# Altium PCB PMP20634.PcbDoc
Units mil, origin at the board's own origin, x right, y up, seen from the top; angles counter-clockwise.
Board outline 3090 x 1240 mil, 2 copper layers (Top Layer, Bottom Layer), stack 62 mil thick; 34 components, 25 nets, 83 pads, 26 vias.
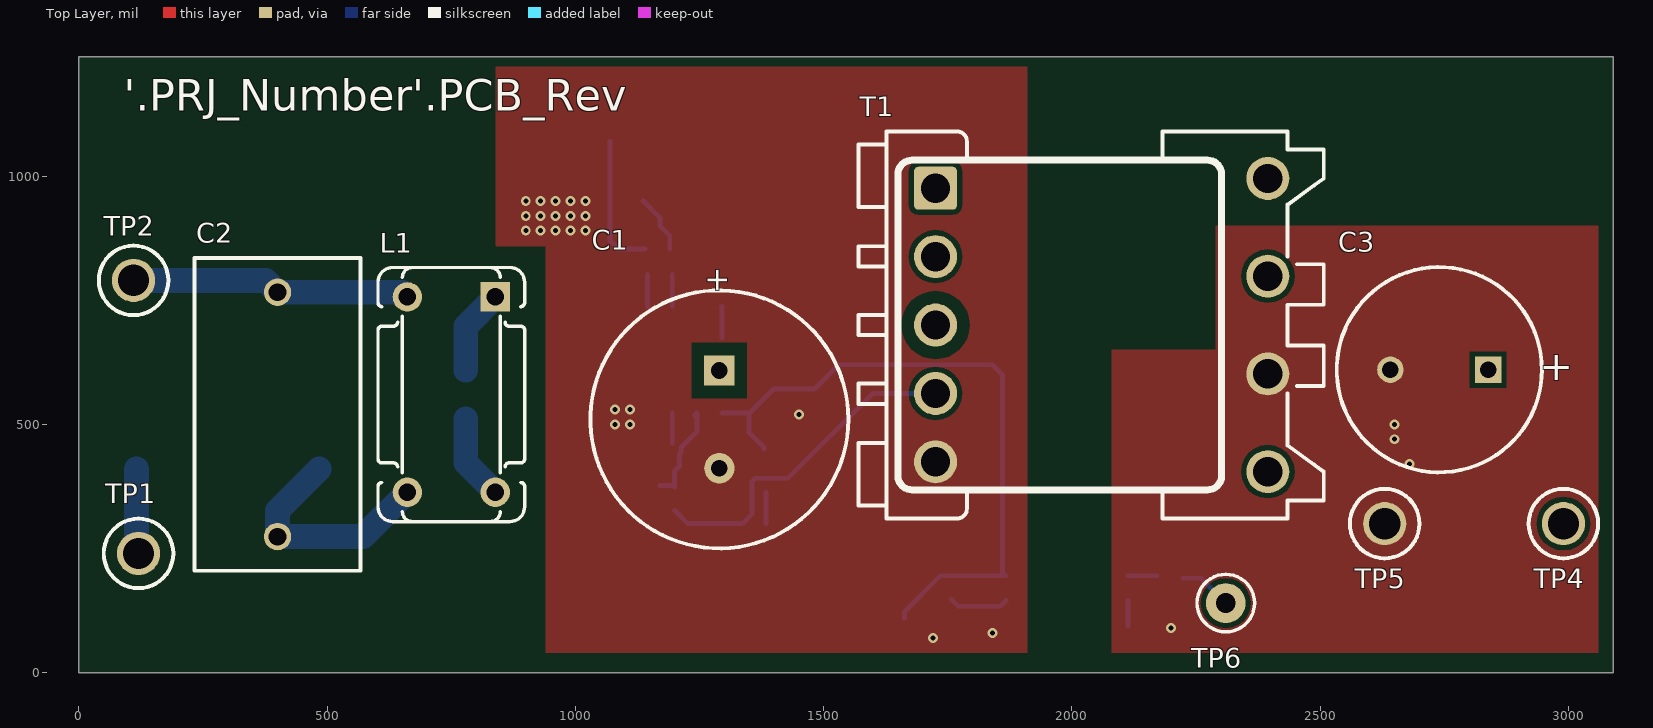
[diagram p0: Top Layer view]
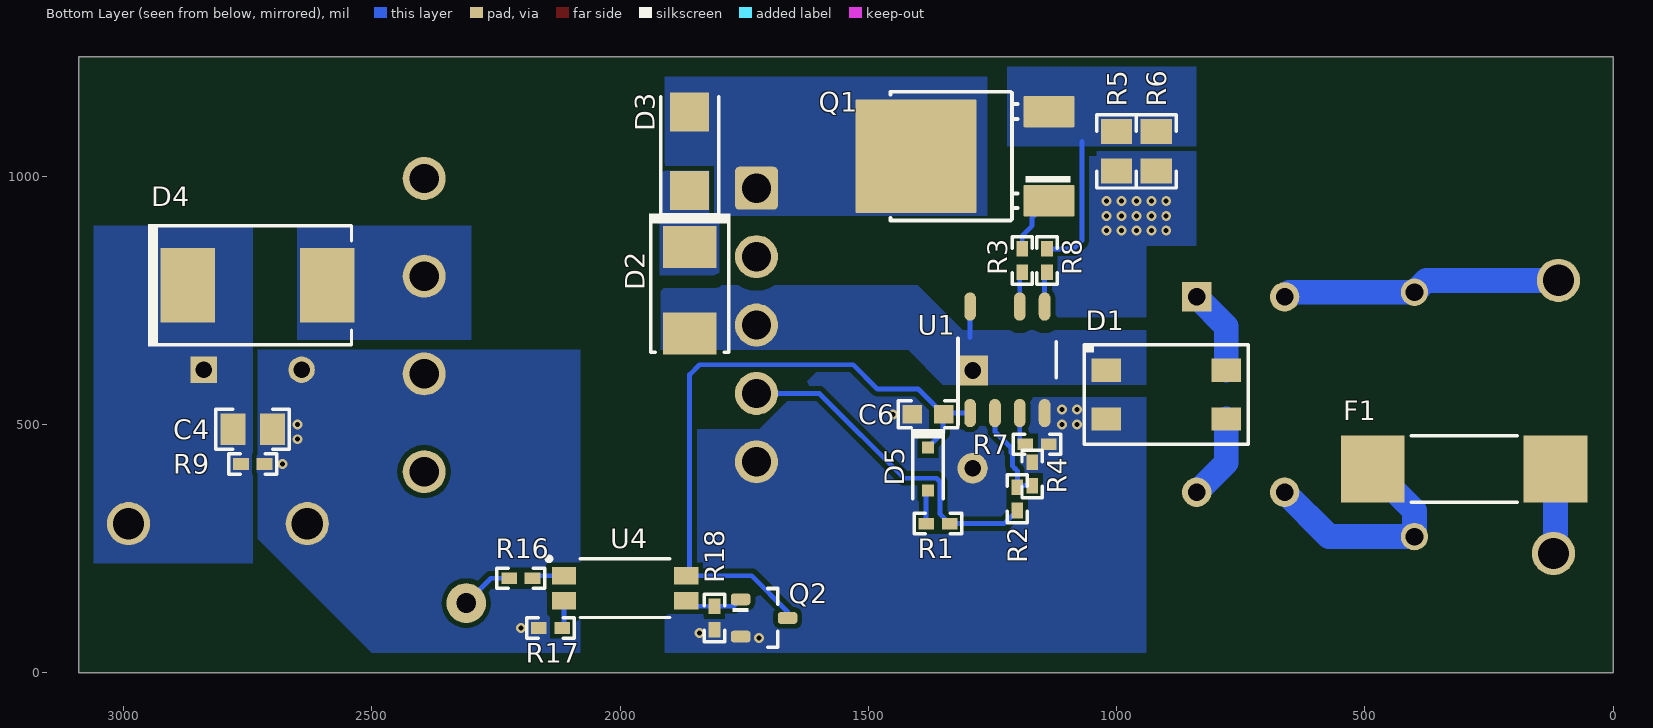
[diagram p1: Bottom Layer view, seen from below]
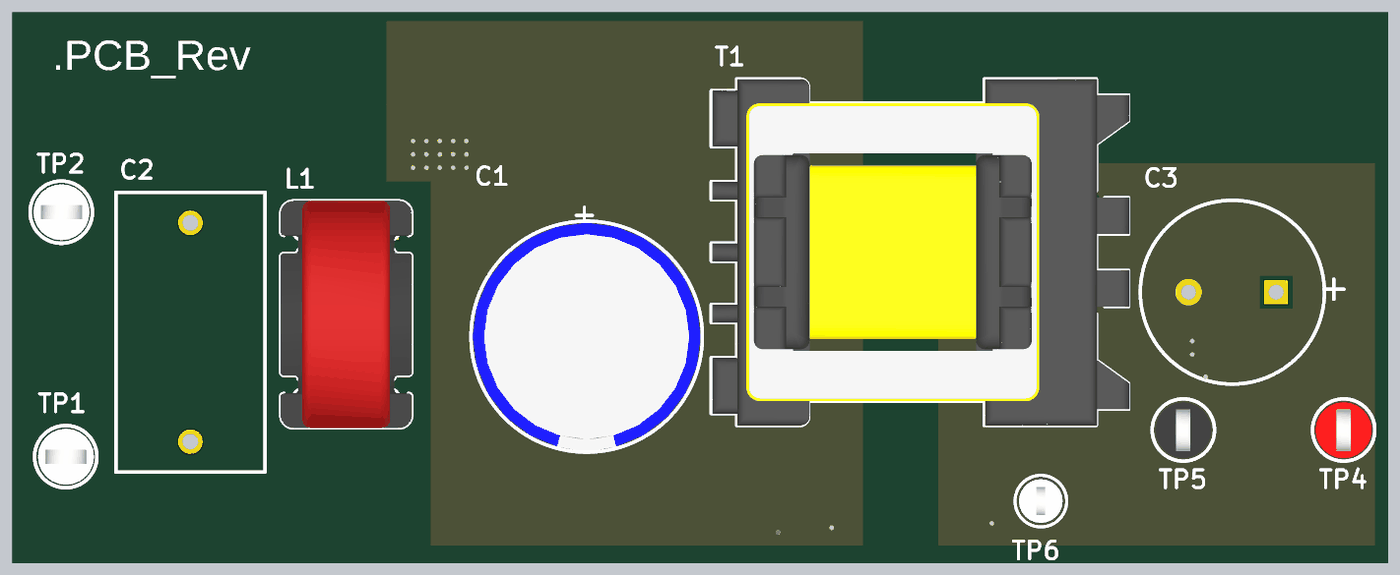
[diagram p2: 3D render of the assembled board from above, using the file's embedded part models]

## Layer stack, top to bottom
Top Solder: solder mask 0.4, Solder Resist, Dk 3.5
Top Layer: signal copper 1.4
Dielectric1: core 59.2, FR-4, Dk 4.8
Bottom Layer: signal copper 1.4
Bottom Solder: solder mask 0.4, Solder Resist, Dk 3.5

## Board outline
0,0 3090,0 3090,1240 0,1240

## Design rules (kind name [scope] priority, off if disabled: settings)
AcuteAngle [All] p1: minimum=4.50000000000000E+0001 checktracksonly=FALSE
AssemblyTestPointUsage [All] p1: valid=2
Clearance Clearance_HV [InNet('HV')] p1: gap=25
Clearance Clearance_BoardEdge_MountingHoles [OnCopper and InComponentClass('Mounting Holes') vs IsKeepOut] p2: gap=40
Clearance Clearance_BoardEdge_Poly [OnCopper and InPoly vs IsKeepOut] p3: gap=25
Clearance Clearance_BoardEdge [OnCopper and Not InComponentClass('Logo') and not InComponentClass('FiducialMark') and not InRegion(1000,500,4000,800) and Not IsKeepout vs IsKeepOut] p4: gap=75
Clearance Clearance_Poly [InPolygon] p5: gap=10
Clearance [All] p6: gap=7.87
ComponentClearance ComponentClearance_ScrewToNut [(HasFootprint('NY PMS 440 0025 PH')) vs (HasFootprint('Keystone_1902C'))] p1: gap=5 collisioncheckmode=3 verticalgap=10 showdistances=FALSE
ComponentClearance ComponentClearance_MountingHoles [InComponentClass('Mounting Holes')] p2: gap=20 collisioncheckmode=3 verticalgap=100000 showdistances=FALSE
ComponentClearance ComponentClearance_SmallPassives [HasFootprint('0201*') or HasFootprint('0402*') or HasFootprint('0508') or HasFootprint('0603*') or HasFootprint('0612') or HasFootprint('0805*') or HasFootprint('0815*') or HasFootprint('0830*') or HasFootprint('1206*') or HasFootprint('1210*') or HasFootprint('1808*') or HasFootprint('1812*') or HasFootprint('1825*') or HasFootprint('2010*') or HasFootprint('2220*') or HasFootprint('2225*') or HasFootprint('2512*') or HasFootprint('2728*') or HasFootprint('3518*') vs HasFootprint('0201*') or HasFootprint('0402*') or HasFootprint('0508') or HasFootprint('0603*') or HasFootprint('0612') or HasFootprint('0805*') or HasFootprint('0815*') or HasFootprint('0830*') or HasFootprint('1206*') or HasFootprint('1210*') or HasFootprint('1808*') or HasFootprint('1812*') or HasFootprint('1825*') or HasFootprint('2010*') or HasFootprint('2220*') or HasFootprint('2225*') or HasFootprint('2512*') or HasFootprint('2728*') or HasFootprint('3518*')] p3: gap=10 collisioncheckmode=3 verticalgap=10 showdistances=FALSE
ComponentClearance ComponentClearance_THtoSMT [IsThruComponent vs IsSMTComponent] p4: gap=20 collisioncheckmode=3 verticalgap=100000 showdistances=FALSE
ComponentClearance ComponentClearance_THtoTH [IsThruComponent vs IsThruComponent] p5: gap=20 collisioncheckmode=3 verticalgap=100000 showdistances=FALSE
ComponentClearance [All] p6: gap=20 collisioncheckmode=3 verticalgap=10 showdistances=FALSE
DiffPairsRouting [All] p1: maxlimit=100 minlimit=10 mostfreqgap=10 toplayer_minwidth=15 toplayer_maxwidth=15 toplayer_prefwidth=15 bottomlayer_minwidth=15 bottomlayer_maxwidth=15 bottomlayer_prefwidth=15 maxuncoupledlength=1000
FabricationTestPointUsage TestPointUsage [All] p1: valid=2 allowmultiple=FALSE
FabricationTestpoint Testpoint [All] p1: side=3 testpointundercomponent=TRUE minsize=40 maxsize=100 preferedsize=60 minholesize=0 maxholesize=40 preferedholesize=32 testpointgrid=1 allowsidetop=TRUE allowsidebottom=TRUE usegrid=TRUE gridtolerance=0.01
FanoutControl Fanout_LCC [IsLCC] p1: bgadir=Out bgaviamode=Centered fanoutstyle=Auto fanoutdirection=Alternating viagrid=1 // Fanout_LCC (Default Rule)
FanoutControl Fanout_BGA [IsBGA] p2: bgadir=Out bgaviamode=Centered fanoutstyle=Auto fanoutdirection=Alternating viagrid=1 // Fanout_BGA (Default Rule)
FanoutControl Fanout_Default [All] p4: bgadir=Out bgaviamode=Centered fanoutstyle=Auto fanoutdirection=Alternating viagrid=1 // Fanout_Default (Default Rule)
FanoutControl Fanout_Small [(CompPinCount < 5)] p5: bgadir=Out bgaviamode=Centered fanoutstyle=Auto fanoutdirection=OutThenIn viagrid=1 // Fanout_Small (Default Rule)
HoleSize [All] p1: absolutevalues=TRUE maxlimit=251 minlimit=7 maxpercent=80.000 minpercent=20.000
MinimumAnnularRing [All] p1: minimumring=5
MinimumSolderMaskSliver MinimumSolderMaskSliver_Logo [InComponentClass('Logo') vs InComponentClass('Logo')] p1: minsoldermaskwidth=0
MinimumSolderMaskSliver SilkscreenOverComponentPads [All] p2: minsoldermaskwidth=0
MinimumSolderMaskSliver [All] p3: minsoldermaskwidth=0
PlaneConnect [All] p1: planeconnectstyle=Direct reliefexpansion=10 reliefentries=4 reliefconductorwidth=10 reliefairgap=10
PolygonConnect [All] p1: connectstyle=Direct reliefconductorwidth=10 reliefentries=4 polygonreliefangle="90 Angle" airgapwidth=10
RoutingVias [All] p1: holewidth=16 width=34 viastyle="Through Hole" minholewidth=7 minwidth=19 maxholewidth=40 maxwidth=65
SMDToCorner [All] p1: distance=0
SilkToBoardRegionClearance [Not ((IsComment or IsDesignator) And (Hide <> 'False')) and not InRegion(1000,500,4000,800)] p1:
SilkToSilkClearance [All] p1: silktosilkclearance=0
SilkToSolderMaskClearance [IsPad] p1: minsilkscreentomaskgap=0 clearancetoexposedcopper=TRUE
SolderMaskExpansion [All] p1: expansion=3
Width [All] p1: maxlimit=100 minlimit=6 preferedwidth=10 checkconnectedcopper=TRUE
15 further rules are at their usual default settings.

## Components (designator, comment, footprint, x,y, rotation, side; value= is the part's Value field where it differs from the comment)
C1 "EKXG401ELL220MK20S" KXG_1250x2000 1290,510 r270 top
C2 "ECQ-U3A104MG" ECQUG_1500x800x1500 400,520 r90 top
C3 "EKZE250ELL681MJ20S" Chemi-Con_1000x2000 2740,610 r180 top
C4 "GRM219R61E106KA12" 0805_HV 2740,490 r180 bottom
C6 "GRM188R6YA475KE15D" 0603 1380,520 r0 bottom
D1 "RH06-T" MiniDIP 900,560 r180 bottom
D2 "SMBJ150A-13-F" SMB 1860,770 r270 bottom
D3 "MURA160T3G" SMA 1860,1050 r90 bottom
D4 "B3100-13-F" SMC 2730,780 r180 bottom
D5 "BAS16J,135" SOD-323F 1380,410 r270 bottom
F1 "0443001.DR" FUSE_0443 300,410 r180 bottom
L1 "744821201" WE-CMB_XS 750,560 r270 top
Q1 "FCD4N60TM" DPAK 1270,1040 r0 bottom
Q2 "AO3406" SOT-23 1710,110 r180 bottom
R1 "CRCW04020000Z0ED" 0402 1360,300 r180 bottom
R2 "CRCW040273K2FKED" 0402 1200,350 r270 bottom
R3 "CRCW04020000Z0ED" 0402 1190,830 r90 bottom
R4 "CRCW040233K2FKED" 0402 1170,400 r270 bottom
R5 "CRCW08051R60JNEA" 0805_HV 1000,1050 r90 bottom
R6 "CRCW08051R60JNEA" 0805_HV 920,1050 r90 bottom
R7 "CRCW0402115KFKED" 0402 1160,460 r0 bottom
R8 "CRCW04021K33FKED" 0402 1140,830 r90 bottom
R9 "CRCW04027K50JNED" 0402 2740,420 r0 bottom
R16 "CRCW04021K00FKED" 0402 2200,190 r180 bottom
R17 "CRCW04021K00FKED" 0402 2140,90 r0 bottom
R18 "CRCW040210K0FKED" 0402 1810,110 r90 bottom
T1 "750316686" Wurth_EE16-8-5_5280 2060,700 r0 top
TP1 "5012" Keystone5012 120,240 r90 top
TP2 "5012" Keystone5012 110,790 r90 top
TP4 "5010" Keystone5010 2990,300 r0 top
TP5 "5011" Keystone5011 2630,300 r0 top
TP6 "5002" Keystone5002 2310,140 r0 top
U1 "UCC28730DR" D0007A_N 1220,630 r90 bottom
U4 "VOS617A-7X001T" SSOP-4_VISHAY 1990,170 r180 bottom

## Footprints (in the part's own frame and the unit in brackets; to place one, negate y for a bottom-side part, rotate by r counter-clockwise, add the part's x,y. Pads: shape width x height; smd on the part's side, far side on the other; paste and mask are expansions set on the pad)
0402 [mm] "0402 from SM-752 data"
  rect 0.8x0.6 smd: 1(-0.6,0) 2(0.6,0)
  silkscreen extent -1.22,-0.52 1.22,0.52, body extent -0.55,-0.3 0.55,0.3, height 0.6
0603 [mm] "0603 from SM-752 data"
  rect 1x0.95 smd: 1(-0.8,0) 2(0.8,0)
  silkscreen extent -1.52,-0.69 1.52,0.69, body extent -0.87,-0.47 0.87,0.47, height 1
0805_HV [mil] "0805 with 30mil clearance between pads"
  rect 50x63 smd: 1(-40,0) 2(40,0)
  silkscreen extent -74,-40 74,40, body extent -43,-29 43,29, height 57
Chemi-Con_1000x2000 [mm] "TH, 2-Leads, Body 10x20mm, Pin Spacing 5mm"
  rect 1.35x1.35 hole 0.85: 1(-2.5,0)
  round 1.35 hole 0.85: 2(2.5,0)
  silkscreen extent -5.25,-5.25 5.25,5.25, body extent -5.25,-5.25 5.25,5.25, height 21.5
D0007A_N [mm] "SOIC, 7-Leads, Body 4.9x3.9mm, Pitch 1.27mm, IPC Medium Density"
  oval 1.45x0.6 smd: 1(-2.725,1.905) 2(-2.725,0.635) 3(-2.725,-0.635) 4(-2.725,-1.905) 5(2.725,-1.905) 6(2.725,-0.635) 8(2.725,1.905)
  silkscreen extent -3.32,-2.5 1.1,2.52, body extent -3.01,-2.45 3.01,2.45, height 1.75
DPAK [mm] "D-PAK, 3-Pads, Body 6.22x6.73mm (max), TO-252AA using nominal STEP model"
  rrect6% 2.6x1.6 smd: 1(-3.4,2.28) 3(-3.4,-2.28)
  rrect2% 6.2x5.8 smd paste-2.9: 4(3.4,0)
  silkscreen extent -4.5,-3.3 4.7,3.28, body extent -3.86,-3.29 5.84,3.29, height 2.48
ECQUG_1500x800x1500 [mm] "TH, 2-Leads, Body 15x8mm, Pin Spacing 12.5mm"
  round 1.4 hole 0.9: 1(-6.25,0) 2(6.25,0)
  silkscreen extent -8,-4.25 8,4.25, body extent -8,-4.25 8,4.25, height 15.5
FUSE_0443 [mm] "LITTELFUSE"
  rect 3.25x3.43 smd: 1(-4.675,0) 2(4.675,0)
  silkscreen extent -2.7,-1.7 2.7,1.7, body extent -5.05,-1.56 5.05,1.56, height 3.12
Keystone5002 [mil] "For Keystone 500x miniature loop terminals"
  round 80 hole 40: 1(0,0)
  silkscreen extent -58,-58 58,58, body extent -49,-49 49,49, height 182
Keystone5010 [mil] "Keystone Multipurpose loops"
  round 87 hole 63: 1(0,0)
  silkscreen extent -70,-70 70,70, body extent -63,-63 63,62, height 319
Keystone5011 [mil] "Keystone Multipurpose loops"
  round 87 hole 63: 1(0,0)
  silkscreen extent -70,-70 70,70, body extent -63,-63 63,62, height 319
Keystone5012 [mil] "Keystone Multipurpose loops"
  round 87 hole 63: 1(0,0)
  silkscreen extent -70,-70 70,70, body extent -63,-63 63,62, height 319
KXG_1250x2000 [mm] "United Chemicon"
  rect 1.55x1.55 hole 0.85: 1(-2.5,0)
  round 1.55 hole 0.85: 2(2.5,0)
  silkscreen extent -6.6,-6.6 6.6,6.6, body extent -6.45,-6.49 6.49,6.49, height 21.51
MiniDIP [mm] "Land pattern created based on STEP model."
  rect 1.52x1.2 smd: 1(-3.075,1.25) 2(-3.075,-1.25) 3(3.075,-1.25) 4(3.075,1.25)
  silkscreen extent -4.19,-2.54 4.19,2.54, body extent -3.5,-2.45 3.5,2.45, height 2.75
SMA [mm] "Molded Diode, 2-Leads, Body 4.3x2.6mm, IPC Medium Density, based on OnSemi component dimensions and land pattern"
  rect 2x2 smd: 1(-2,0) 2(2,0)
  silkscreen extent -3.66,-1.57 2.79,1.57, body extent -2.6,-1.3 2.6,1.3, height 2.42
SMB [mil] "Molded Diode, 2-Leads, Body 5.4x3.6mm, IPC Medium Density, based on OnSemi component dimensions"
  rect 85x107.99 smd: 1(-87.01,0) 2(87.01,0)
  silkscreen extent -155,-82 125,82, body extent -106,-71 106,71, height 91
SMC [mil] "Molded Diode, 2-Leads, Body 6.9x5.8mm, IPC Medium Density, based on OnSemi component dimensions and land patterns"
  rect 110x150 smd: 1(-140.49,0) 2(140.49,0)
  silkscreen extent -221,-123 189,124, body extent -156,-116 157,116, height 91
SOD-323F [mm] "NXP recommended land pattern"
  rect 0.6x0.6 smd paste-0.05: 1(-1.1,0) 2(1.1,0)
  silkscreen extent -2.06,-0.86 1.53,0.86, body extent -1.35,-0.68 1.35,0.67, height 0.79
SOT-23 [mm] "SOT23, 3-Leads, Body 2.9x1.3mm, Pitch 0.95mm, Lead Span 2.5mm, IPC Medium Density"
  rrect50% 1x0.6 smd: 1(-1.2,0.95) 2(-1.2,-0.95) 3(1.2,0)
  silkscreen extent -1.63,-1.5 0.7,1.5, body extent -1.16,-1.45 1.21,1.45, height 1
SSOP-4_VISHAY [mm] "Vishay Recommened"
  rect 1.25x0.9 smd: 1(-3.125,0.635) 2(-3.125,-0.635) 3(3.125,-0.635) 4(3.125,0.635)
  silkscreen extent -3.98,-1.5 2.3,1.59, body extent -3.5,-1.45 3.5,1.45, height 2.42
WE-CMB_XS [mm] "WE-CMB Series Size XS"
  rect 1.5x1.5 hole 0.9: 1(-5,2.25)
  round 1.5 hole 0.9: 2(-5,-2.25) 3(5,-2.25) 4(5,2.25)
  silkscreen extent -6.5,-3.75 6.5,3.75, body extent -6.5,-3.75 6.5,3.75, height 16.24
Wurth_EE16-8-5_5280 [mm] "Wurth"
  rrect20% 2.2x2.2 hole 1.5: 1(-8.5,7)
  round 2.2 hole 1.5: 2(-8.5,3.5) 3(-8.5,0) 4(-8.5,-3.5) 5(-8.5,-7) 6(8.5,-7.5) 7(8.5,-2.5) 8(8.5,2.5) 9(8.5,7.5)
  silkscreen extent -12.45,-9.9 11.36,9.9, body extent -12.4,-9.9 11.41,9.9, height 14.9

## Part data
C1: "CAP, AL, 22 µF, 400 V, +/- 20%, TH"
C2: "CAP, Film, 0.1 µF, 300 V, +/- 20%, TH"
C3: "CAP, AL, 680 µF, 25 V, +/- 20%, TH"
C4: "CAP, CERM, 10 µF, 25 V, +/- 10%, X5R, 0805"
C6: "CAP, CERM, 4.7 µF, 35 V, +/- 10%, X5R, 0603"
D1: "Diode, Switching-Bridge, 600 V, 0.5 A, MiniDIP"
D2: "Diode, TVS, Uni, 150 V, 243 Vc, SMB"
D3: "Diode, Ultrafast, 600V, 1A, SMA"
D4: "Diode, Schottky, 100 V, 3 A, SMC"
D5: "Diode, Switching, 100 V, 0.25 A, SOD-323F"
F1: "Fuse, 1 A, 250VAC/VDC, SMD"
L1: "Coupled inductor, 1 mH, 2 A, 0.045 ohm, TH"
Q1: "MOSFET, N-CH, 600 V, 3.9 A, DPAK"
Q2: "MOSFET, N-CH, 30 V, 3.6 A, SOT-23"
R1 R3: "RES, 0, 5%, 0.063 W, 0402"
R2: "RES, 73.2 k, 1%, 0.063 W, 0402"
R4: "RES, 33.2 k, 1%, 0.063 W, 0402"
R5 R6: "RES, 1.6, 5%, 0.125 W, 0805"
R7: "RES, 115 k, 1%, 0.063 W, 0402"
R8: "RES, 1.33 k, 1%, 0.063 W, 0402"
R9: "RES, 7.5 k, 5%, 0.063 W, 0402"
R16 R17: "RES, 1.00 k, 1%, 0.063 W, 0402"
R18: "RES, 10.0 k, 1%, 0.063 W, 0402"
T1: "Transformer, 500 uH, EE16/8/5, TH"
TP1 TP2: "Test Point, Multipurpose, White, TH"
TP4: "Test Point, Multipurpose, Red, TH"
TP5: "Test Point, Multipurpose, Black, TH"
TP6: "Test Point, Miniature, White, TH"
U1: "Constant-Voltage Constant-Current Flyback Controller With PSR and Wake-Up Monitoring, D0007A (SOIC-7)"
U4: "Optocoupler, 3.75 kV, 80-160% CTR, SMT"

## Via types
v1: diameter 20, hole 10, Top Layer to Bottom Layer, tented both sides, 26 vias

## Nets (pads, with @x,y where several pads share a name; then routed paths per layer and width w, separated by ;. In a path a pad name is that pad's centre, name@x,y a point inside that pad or via, vN(x,y) a via of type N, cw(c..) or ccw(c..) an arc to the next point about the centre after c; other vN are vias at no path point)
12VOUT: C3.1 C4.1 D4.1 R9.2 TP4.1
GND: C3.2 C4.2 R9.1 R17.2 T1.7 TP5.1
  other v1: 2200,90 2680,420 2650,470 2650,500
HV: C1.1 D1.1 D2.2 T1.3 U1.8 | length 62.3
  Bottom Layer w10: 1295,675 U1.8
NetC2_1: C2.1 F1.1 L1.3 | length 469.3
  Bottom Layer w50: F1.1 400,325.94 C2.1 572.2,273.94 L1.3
NetC2_2: C2.2 L1.2 TP2.1 | length 565.1
  Bottom Layer w50: TP2.1 376.06,790 C2.2 652.2,766.06 L1.2
NetD1_3: D1.3 L1.4 | length 172.3
  Bottom Layer w50: D1.3 778.94,422.8 L1.4
NetD1_4: D1.4 L1.1 | length 172.3
  Bottom Layer w50: D1.4 778.94,697.2 L1.1
NetD2_1: D2.1 D3.1
NetD3_2: D3.2 Q1.4 T1.1
NetD4_2: D4.2 T1.8
NetD5_2: D5.2 R1.1 | length 63.1
  Bottom Layer w10: R1.1 D5.2@1383.62,363.07
NetF1_2: F1.2 TP1.1 | length 165.9
  Bottom Layer w50: TP1.1@115.94,244.06 F1.2
NetQ1_1: Q1.1 R3.2 | length 118.9
  Bottom Layer w10: Q1.1 1170,916.38 1170,900 1190,880 R3.2
NetQ1_3: Q1.3 R5.2 R6.2 R8.2 | length 276.8
  Bottom Layer w10: 1070,1070 1070,870 1086.38,853.62 R8.2
NetQ2_1: Q2.1 R18.2 U4.3 | length 120.1
  Bottom Layer w10: Q2.1 1771.02,133.62 R18.2 1855.59,133.62 U4.3
NetR1_2: R1.2 R2.2 T1.4 | length 682.9
  Bottom Layer w10: R2.2 1226.38,300 R1.2 1355.32,318.94 1355.32,383.84 1362.86,391.38 1427.76,391.38 1598.58,562.2 T1.4
NetR2_1: R2.1 R4.2 U1.2 | length 200.8
  Bottom Layer w10: R4.2 1197.24,376.38 R2.1 1200,406.38 ; 1203.62,410 1210,416.38 1210,440.43 1212.37,442.8 1212.37,452.37 1245,485 U1.2 U1.2@1240,517.72
NetR3_1: R3.1 U1.6 | length 64.1
  Bottom Layer w10: U1.6 R3.1@1195,801.38
NetR7_2: R7.2 U1.3 | length 61.3
  Bottom Layer w10: R7.2@1195,461.38 U1.3
NetR8_1: R8.1 U1.5 | length 64.1
  Bottom Layer w10: U1.5 R8.1@1145,801.38
NetR16_1: R16.1 TP6.1 | length 107.1
  Bottom Layer w10: R16.1 2260,190 TP6.1
NetR16_2: R16.2 U4.1 | length 58.3
  Bottom Layer w10: U4.1 R16.2@2171.38,195
NetR17_1: R17.1 U4.2 | length 51.7
  Bottom Layer w10: R17.1@2113.03,93.35 U4.2
PGND: C1.2 C6.2 D1.2 Q2.2 R4.1 R5.1 R6.1 R7.1 R18.1 T1.5 U1.4
  other v1: 1720,70 1840,80 1080,500 1110,500 1450,520 1080,530 1110,530 900,890 930,890 960,890 990,890 1020,890 900,920 930,920 960,920 990,920 1020,920 900,950 930,950 960,950 990,950 1020,950
VDD: C6.1 D5.1 Q2.3 U1.1 U4.4 | length 1353.7
  Bottom Layer w10: U1.1 1345.79,522.72 C6.1 ; D5.1@1380,450 D5.1 1350,483.31 1350,518.5 C6.1 ; Q2.3 1662.76,122.76 1735,195 U4.4 1860,201.97 1860,600 1840,620 1530.67,620 1481.88,571.21 1399.72,571.21 C6.1
pads on no net: T1.2 T1.6 T1.9

## Polygon pours and split planes (outlines as drawn)
HV on Bottom Layer "BOTTOM_LAYER_HV_P026" (solid, remove dead copper, pour order 26): 1550,650 1420,650 1350,580 1230,580 940,580 940,690 1310,690 1400,780 1710,780 1918.5,780 1918.5,650
PGND on Bottom Layer "BOTTOM_LAYER_PGND_P027" (solid, remove dead copper, pour order 27): 840,1034.51 840,860 940,860 940,40 1910,40 1910,490 1720,490 1170,1040 840,1040
GND on Bottom Layer "BOTTOM_LAYER_GND_P018" (solid, remove dead copper, pour order 18): 2080,650 2080,40 2500,40 2740,280 2740,650
PGND on Bottom Layer "BOTTOM_LAYER_PGND_P016" (solid, remove dead copper, pour order 16): 840,1060 840,860 1040,860 1040,1060
12VOUT on Bottom Layer "BOTTOM_LAYER_12VOUT_P014" (solid, remove dead copper, pour order 14): 2740,900 2740,220 3060,220 3060,900 2740,900
NetD4_2 on Bottom Layer "BOTTOM_LAYER_NETD4_2_P012" (solid, remove dead copper, pour order 12): 2300,900 2300,670 2650,670 2650,900 2300,900
NetD2_1 on Bottom Layer "BOTTOM_LAYER_NETD2_1_P008" (solid, remove dead copper, pour order 8): 1800,1050 1800,800 1920,800 1920,1050
NetD3_2 on Bottom Layer "BOTTOM_LAYER_NETD3_2_P006" (solid, remove dead copper, pour order 6): 1260,1200 1260,920 1910,920 1910,1200
NetQ1_3 on Bottom Layer "BOTTOM_LAYER_NETQ1_3_P004" (solid, remove dead copper, pour order 4): 840,1220 840,1060 1220,1060 1220,1220
GND on Top Layer "TOP_LAYER_GND_P024" (solid, remove dead copper, pour order 24): 2080,40 2080,650 2290,650 2290,900 3060,900 3060,220 3060,40 2080,40
PGND on Top Layer "TOP_LAYER_PGND_P022" (solid, remove dead copper, pour order 22): 1910,1220 840,1220 840,860 840.81,859.19 940,859.19 940,40 1910,40

## Keep-outs
Keep-Out Layer:
  text ".Layer_Name" at 577,-858.49 h60

## Other copper
Top Layer:
  text ".Layer_Name" at 577,-858.49 h60
Bottom Layer:
  text ".Layer_Name" at 577,-858.49 h60

## Silkscreen, mask and mechanical layers (free items; w line width, h text height)
Top Overlay:
  text "'.PRJ_Number'.PCB_Rev" at 90,1110 h108.27
  text ".Layer_Name" at 577,-858.49 h60
Bottom Overlay:
  text ".Layer_Name" at 577,-858.49 h60
Top Paste:
  text ".Layer_Name" at 577,-858.49 h60
Bottom Paste:
  text ".Layer_Name" at 577,-858.49 h60
Top Solder:
  text ".Layer_Name" at 577,-858.49 h60
  text ".Layer_Name" at 577,-858.49 h60
Bottom Solder:
  text ".Layer_Name" at 577,-858.49 h60
Drill Guide:
  text ".Layer_Name" at 577,-858.49 h60
M1 Board Outline:
  the board outline again, w10
  text ".Layer_Name" at 577,-858.49 h60
M2 Board Dimensions:
  rectangle: 0,-275 125,-150
  rectangle: 125,-400 500,-275
  lines w7: 0,-275 1000,-275 ; 125,-400 125,-150 ; 250,-400 250,-150 ; 500,-400 500,-150 ; 750,-400 750,-150 ; 0,-400 1000,-400 1000,-150 0,-150 0,-400
  text ".Layer_Name" at 577,-858.49 h60
M3 3D STEP Top:
  text ".Layer_Name" at 577,-858.49 h60
M4 3D STEP Bottom:
  text ".Layer_Name" at 577,-858.49 h60
M5 Assembly Top:
  lines w10: -292,-930.17 6308,-930.17 ; -292,-726.83 6310,-726.83 ; -292,-523.5 -292,-1133.5 3713,-1133.5 6310,-1133.5 6310,-523.5 -291.5,-523.5 -291.5,-1133.5 1284,-1133.5 ; 2173,-1133.5 2173,-523.5 ; 3440,-726.83 3440,-523.5 ; 4280,-726.83 4280,-523.5 ; 4902,-1140 4902,-937.17
  text "COMPONENTS MARKED 'DNP' SHOULD NOT BE POPULATED." at 1153.5,-318.5 h60
  text "ASSEMBLY VARIANT:" at 1153,-434 h60
  text ".VariantName" at 2189,-434 h60
  text "PCB VIEWED FROM TOP SIDE" at -228.5,-655.67 h60
  text "BOARD #:" at 2248,-655.67 h60
  text ".PRJ_Number" at 2793.5,-655.67 h60
  text "REV:" at 3638,-655.67 h60
  text ".PCB_Rev" at 3929.5,-655.67 h60
  text "SVN REV:" at 4476,-655.67 h60
  text ".VersionControl_RevNumber" at 4982,-655.67 h60
  text "TID #:" at 2248,-859 h60
  text ".TID" at 2793.5,-859 h60
  text "PLOT NAME =" at -228.5,-1064.34 h60
  text ".plot_File_Name" at 577,-1064.34 h60
  text "GENERATED    :" at 2250,-1064.34 h60
  text ".Print_Date" at 3119.5,-1064.34 h60
  text ".Print_Time" at 3848.5,-1064.34 h60
  text "TEXAS INSTRUMENTS" at 5113,-1064.34 h60
M6 Assembly Bottom:
  lines w10: -292.5,-727.33 6309.5,-727.33 ; -290.5,-930.67 6309.5,-930.67 ; 1115.5,-1140.5 1115.5,-937.67 ; 1737.5,-727.33 1737.5,-524 ; 2577.5,-727.33 2577.5,-524 ; 3844.5,-1134 3844.5,-524 ; 4733.5,-1134 6309,-1134 6309,-524 -292.5,-524 -292.5,-1134 2304.5,-1134 6309.5,-1134 6309.5,-524
  text "COMPONENTS MARKED 'DNP' SHOULD NOT BE POPULATED." at 6102,-318 h60
  text ".VariantName" at 5058,-434 h60
  text "ASSEMBLY VARIANT:" at 6097,-434 h60
  text ".VersionControl_RevNumber" at 1035.5,-656.17 h60
  text "SVN REV:" at 1541.5,-656.17 h60
  text ".PCB_Rev" at 2088,-656.17 h60
  text "REV:" at 2379.5,-656.17 h60
  text ".PRJ_Number" at 3224,-656.17 h60
  text "BOARD #:" at 3769.5,-656.17 h60
  text "PCB VIEWED FROM BOTTOM SIDE" at 6246,-656.17 h60
  text ".TID" at 3224,-859.5 h60
  text "TID #:" at 3769.5,-859.5 h60
  text "TEXAS INSTRUMENTS" at 904.5,-1064.84 h60
  text ".Print_Time" at 2169,-1064.84 h60
  text ".Print_Date" at 2898,-1064.84 h60
  text "GENERATED    :" at 3767.5,-1064.84 h60
  text ".plot_File_Name" at 5440.5,-1064.84 h60
  text "PLOT NAME =" at 6246,-1064.84 h60
M9 Title Sheet:
  drawing of 57 lines, arcs and shapes, not listed
  text "1" at 739.84,8036.5 h70
  text "2" at 3235.5,8036.5 h70
  text "3" at 5724.84,8036.5 h70
  text "4" at 8231.51,8036.5 h70
  text "5" at 10730.5,8036.5 h70
  text "6" at 13235.5,8036.5 h70
  text "A" at -416.5,6893.5 h70
  text "A" at 14383.5,6893.5 h70
  text "B" at -416.5,4513.5 h70
  text "B" at 14383.5,4513.5 h70
  text "C" at -416.5,2138.5 h70
  text "C" at 14383.5,2138.5 h70
  text "PROJECT TITLE:" at 11343.5,277.5 h45
  text ".PRJ_Title" at 11393.5,144.17 h70
  text "DESIGNED FOR:" at 11343.5,-23.5 h45
  text ".PRJ_Customer" at 11393.5,-163.5 h70
  text "D" at -416.5,-231.5 h70
  text "D" at 14383.5,-231.5 h70
  text "FILE NAME:" at 11343.5,-323.5 h45
  text ".PCB_File_Name_No_Path" at 11393.5,-443.5 h70
  text "Texas Instruments (TI) and/or its licensors do not warrant the accuracy or completeness of this specification" at 6374,-605.34 h45
  text "ENGINEER:" at 11343.5,-613.5 h45
  text "LAYOUT BY:" at 12848.5,-613.5 h45
  text "or any information contained therein. TI and/or its licensors do not warrant that this design will meet" at 6329.01,-718 h45
  text ".PRJ_Engineer" at 11393.5,-768.49 h70
  text ".PCB_Layout" at 12899,-768.49 h70
  text "the specifications, will be suitable for your application or fit for any particular purpose, or will operate in" at 6329.01,-830.67 h45
  text ".Layer_Name" at 577,-858.49 h60
  text "ALTIUM DESIGNER VERSION:" at 12848.5,-923.5 h45
  text "an implementation. TI and/or its licensors do not warrant that the design is production worthy. You should" at 6329.01,-943.33 h45
  text "completely validate and test your design implementation to confirm the system functionality for your application." at 6374,-1056 h45
  text ".print_Scale" at 11393.5,-1056.83 h70
  text ".Application_BuildNumber" at 12899,-1056.83 h70
  text "1" at 739.84,-1263.5 h70
  text "2" at 3235.5,-1263.5 h70
  text "3" at 5724.84,-1263.5 h70
  text "4" at 8231.51,-1263.5 h70
  text "5" at 10730.5,-1263.5 h70
  text "6" at 13235.5,-1263.5 h70
M10 Fab Notes:
  drawing of 173 lines, arcs and shapes, not listed
  text "DESIGN INFORMATION" at 12378.02,6201 h60
  text "MIN. TRACK WIDTH:" at 11733.46,6021 h60
  text "8" at 12829.7,6021 h60
  text "MIL" at 12984.46,6021 h60
  text "MIN. CLEARANCE:" at 11733.46,5889 h60
  text "0.2" at 12769.7,5889 h60
  text "mm" at 12984.46,5889 h60
  text "MIN. VIA PAD SIZE:" at 11733.46,5757 h60
  text "24" at 12799.71,5757 h60
  text "MIL" at 12984.46,5757 h60
  text "0.05mm (2MIL)" at 12428.46,5615.29 h60
  text "MINIMUM ANNULAR RING" at 11404.23,5611 h60
  text "EXTERNAL" at 13136.46,5611 h60
  text "PER" at 11604.23,5493 h60
  text "IPC-D-275 CLASS 2 LEVEL C" at 11824.23,5493 h60
  text "MIL, HOLES" at 13312.46,5380.71 h60
  text "+/-" at 12920,5380 h60
  text "+/-" at 13774,5380 h60
  text "REGISTRATION TOLERANCES:" at 11404.23,5375 h60
  text "METAL" at 12604,5375 h60
  text "5" at 13180.2,5375 h60
  text "3" at 14013.2,5375 h60
  text "MIL" at 14129.46,5375 h60
  text "+/-" at 13774,5262 h60
  text "HOLE SIZE TOLERANCE (UNLESS OTHERWISE SPECIFIED):" at 11404.23,5257 h60
  text "3" at 14013.2,5257 h60
  text "MIL" at 14129.46,5257 h60
  text "MATERIAL:" at 11329.46,5047.54 h60
  text "FR-4 High Tg" at 12315.9,4907.21 h60
  text "FR-408" at 11750.46,4898.64 h60
  text "OTHER" at 13238.46,4898.64 h60
  text "X" at 12161,4895 h60
  text "62 MIL (1.6mm) +/-10%" at 12070.56,4735.92 h60
  text "THICKNESS:" at 11404.23,4731.64 h60
  text "X" at 11942.4,4731.64 h60
  text "OTHER" at 13355.46,4731.64 h60
  text "TOLERANCE:" at 11404.23,4573.64 h60
  text "X" at 12243.53,4573.64 h60
  text "ANSI IPC-6012 TYPE 3 CLASS 2" at 12430.48,4573.64 h60
  text "OTHER +/-" at 12430.46,4417.64 h60
  text "BOW & TWIST:" at 11404.23,4260.64 h60
  text "X" at 12243.53,4260.64 h60
  text "ANSI IPC-6012 TYPE 3 CLASS 2" at 12430.48,4260.64 h60
  text "OTHER +/-" at 12430.46,4102.13 h60
  text "DRILLING:" at 11329.46,3963.64 h60
  text "REFERENCE:" at 11404.23,3846.64 h60
  text "X" at 12052.46,3846.64 h60
  text "AS SHOWN" at 12239.46,3846.64 h60
  text "X" at 12953.46,3846.64 h60
  text "NC_DRILL FILES" at 13090.46,3846.64 h60
  text "PTH COPPER THICKNESS:" at 11404.23,3688.64 h60
  text "X" at 12534.46,3688.64 h60
  text "20-30 um" at 12671.46,3688.64 h60
  text "OTHER" at 13388.46,3688.64 h60
  text "BOARD FINISH:" at 11329.46,3529.64 h60
  text "SILKSCREEN:" at 11484.68,3411.64 h60
  text "X" at 12433.46,3411.64 h60
  text "TOP" at 12559.46,3411.64 h60
  text "X" at 12943.46,3411.64 h60
  text "BOTTOM" at 13070.46,3411.64 h60
  text "SILKSCREEN COLOR:" at 11484.68,3244.64 h60
  text "X" at 12432.42,3244.64 h60
  text "WHITE" at 12559.46,3244.64 h60
  text "OTHER" at 13070.46,3244.64 h60
  text "X" at 13170,3100 h60
  text "BLUE" at 13700,3090 h60
  text "GREEN" at 12690.46,3085.44 h60
  text "OTHER" at 13308.46,3085.44 h60
  text "SOLDER RESIST COLOR:" at 11484.68,3074.64 h60
  text "X" at 12563.42,2915.44 h60
  text "MATTE" at 12690.46,2915.44 h60
  text "SEMI-GLOSS" at 13308,2914.8 h60
  text "IMMERSION GOLD (ENIG)" at 12390.46,2726.92 h60
  text "ENEPIG" at 13728,2723.64 h60
  text "SURFACE FINISH:" at 11329.46,2722.64 h60
  text "X" at 12203.51,2722.64 h60
  text "IMM. TIN/SILVER OR EQUIV" at 11659,2565.64 h60
  text "OTHER" at 13090.46,2565.64 h60
  text "ARRAY/PANEL:" at 11329.46,2386.64 h60
  text "CUT AND TRIM PER M1 BOARD OUTLINE" at 12390.46,2382.35 h60
  text "N.C. ROUTE" at 12390.46,2230.64 h60
  text "X" at 13069.46,2230.64 h60
  text "V. SCORE" at 13256.46,2230.64 h60
  text "CERTIFICATION:" at 11329.46,2093.64 h60
  text "MATERIALS AND WORKMANSHIP FOR ALL PCBS" at 12054.46,2093.64 h60
  text "TO MEET OR EXCEED THE REQUIREMENTS OF:" at 12054.46,1995.64 h60
  text "X" at 11680.96,1859.13 h60
  text "ANSI IPC-A-600F CLASS ->" at 11819.96,1859.13 h60
  text "X" at 13459.02,1859.13 h60
  text "2" at 13577.96,1859.14 h60
  text "1" at 13262.96,1857.64 h60
  text "3" at 13931.96,1857.64 h60
  text "X" at 12495.02,1699.64 h60
  text "RoHS" at 12631.96,1699.64 h60
  text "OTHER" at 13276.36,1699.64 h60
  text "PER ORDER" at 13673.42,1699.64 h60
  text "ALL BOARDS MUST MEET OR EXCEED UL94-V0 REQUIREMENTS." at 11357,1534 h60
  text "PCB MUST BEAR THE UL94V-0 UL REGISTERED MATERIAL ID NUMBER" at 11357,1414 h60
  text "ADDITIONAL REQUIREMENTS:" at 11329.46,1240.64 h60
  text "MICROSECTION:" at 11404.23,1125.64 h60
  text "YES" at 12309.96,1125.64 h60
  text "X" at 12600,980 h60
  text "REQUIRED" at 13171.46,969.49 h60
  text "BARE BOARD ELEC. TEST:" at 11404.23,966.64 h60
  text "NONE" at 12709.96,966.64 h60
  text "PER ORDER" at 13763.46,966.64 h60
  text ".Layer_Name" at 577,-858.49 h60
M11 Gerber Information:
  lines w10: -292,-930.17 6308,-930.17 ; -292,-726.83 6310,-726.83 ; -292,-523.5 -292,-1133.5 3713,-1133.5 6310,-1133.5 6310,-523.5 -291.5,-523.5 -291.5,-1133.5 1284,-1133.5 ; 2173,-1133.5 2173,-523.5 ; 3440,-726.83 3440,-523.5 ; 4280,-726.83 4280,-523.5 ; 4902,-1140 4902,-937.17
  text "ALL ARTWORK VIEWED FROM TOP SIDE" at -228.5,-655.67 h60
  text "BOARD #:" at 2248,-655.67 h60
  text ".PRJ_Number" at 2793.5,-655.67 h60
  text "REV:" at 3638,-655.67 h60
  text ".PCB_Rev" at 3929.5,-655.67 h60
  text "SVN REV:" at 4476,-655.67 h60
  text ".VersionControl_RevNumber" at 4982,-655.67 h60
  text "LAYER NAME =" at -228.5,-858.49 h60
  text "TID #:" at 2248,-859 h60
  text ".TID" at 2793.5,-859 h60
  text "PLOT NAME =" at -228.5,-1064.34 h60
  text ".plot_File_Name" at 577,-1064.34 h60
  text "GENERATED    :" at 2250,-1064.34 h60
  text ".Print_Date" at 3119.5,-1064.34 h60
  text ".Print_Time" at 3848.5,-1064.34 h60
  text "TEXAS INSTRUMENTS" at 5113,-1064.34 h60
M12 Stackup:
  drawing of 191 lines, arcs and shapes, not listed
  text "Layer" at 9780.09,7800 h60
  text "Name" at 10190,7800 h60
  text "Material" at 11119.74,7800 h60
  text "Thickness" at 11979.51,7800 h60
  text "Constant" at 12629.35,7800 h60
  text "Board Layer Stack" at 13199.21,7800 h60
  text "1" at 9780.09,7680 h60
  text "Top Overlay" at 10190,7680 h60
  text "2" at 9780.09,7560 h60
  text "Top Solder" at 10190,7560 h60
  text "Solder Resist" at 11119.74,7560 h60
  text "0.40mil" at 11979.51,7560 h60
  text "3.5" at 12629.35,7560 h60
  text "3" at 9780.09,7440 h60
  text "Top Layer" at 10190,7440 h60
  text "Copper" at 11119.74,7440 h60
  text "1.40mil" at 11979.51,7440 h60
  text "4" at 9780.09,7320 h60
  text "Dielectric1" at 10190,7320 h60
  text "FR-4" at 11119.74,7320 h60
  text "59.20mil" at 11979.51,7320 h60
  text "4.8" at 12629.35,7320 h60
  text "5" at 9780.09,7200 h60
  text "Bottom Layer" at 10190,7200 h60
  text "Copper" at 11119.74,7200 h60
  text "1.40mil" at 11979.51,7200 h60
  text "6" at 9780.09,7080 h60
  text "Bottom Solder" at 10190,7080 h60
  text "Solder Resist" at 11119.74,7080 h60
  text "0.40mil" at 11979.51,7080 h60
  text "3.5" at 12629.35,7080 h60
  text "7" at 9780.09,6960 h60
  text "Bottom Overlay" at 10190,6960 h60
  text ".Layer_Name" at 577,-858.49 h60
M13 Component Bodies Top:
  text ".Layer_Name" at 577,-858.49 h60
M14 Component Bodies Bottom:
  text ".Layer_Name" at 577,-858.49 h60
M15 Courtyards Top:
  text ".Layer_Name" at 577,-858.49 h60
M16 Courtyards Bottom:
  text ".Layer_Name" at 577,-858.49 h60
Drill Drawing:
  lines w10: 3236.09,452.31 3291.34,452.31 3263.72,397.06 3236.09,452.31 ; 3236.09,521.38 3236.09,535.19 3249.9,549 3236.09,562.82 3236.09,576.63 3249.9,576.63 3263.72,562.82 3277.53,576.63 3291.34,576.63 3291.34,562.82 3277.53,549 3291.34,535.19 3291.34,521.38 3277.53,521.38 3263.72,535.19 3249.9,521.38 3236.09,521.38 ; 3236.09,659.51 3249.9,659.51 3249.9,645.7 3277.53,645.7 3277.53,659.51 3291.34,659.51 3291.34,687.14 3277.53,687.14 3277.53,700.95 3249.9,700.95 3249.9,687.14 3236.09,687.14 3236.09,659.51 ; 3236.09,783.83 3249.9,783.83 3263.72,770.02 3277.53,783.83 3291.34,783.83 3277.53,797.64 3291.34,811.46 3277.53,811.46 3263.72,825.27 3249.9,811.46 3236.09,811.46 3249.9,797.64 3236.09,783.83 ; 3236.09,894.34 3291.34,894.34 3291.34,949.59 3236.09,949.59 3236.09,894.34 ; 3236.09,1046.28 3263.72,1018.66 3291.34,1046.28 3263.72,1073.91 3236.09,1046.28
  lines w12: 3186,359.76 6417.49,359.76 ; 3186,1105.68 6417.49,1105.68 ; 3523.86,235.44 3523.86,1230 ; 3855.86,235.44 3855.86,1230 ; 4492.43,235.44 4492.43,1230 ; 4751.57,235.44 4751.57,1230 ; 5126.72,235.44 5126.72,1230 ; 5851.05,235.44 5851.05,1230 ; 3186,235.44 6417.49,235.44 6417.49,1230 3186,1230 3186,235.44
  text "Symbol" at 3260.59,1142.98 h72
  text "Quantity" at 3561.16,1142.98 h72
  text "Finished Hole Size" at 3893.16,1142.98 h72
  text "Plated" at 4529.72,1142.98 h72
  text "Hole Type" at 4788.86,1142.98 h72
  text "Drill Layer Pair" at 5164.02,1142.98 h72
  text "Hole Tolerance" at 5888.35,1142.98 h72
  text "26" at 3561.16,1018.66 h60
  text "10.00mil (0.254mm)" at 3893.16,1018.66 h60
  text "PTH" at 4529.72,1018.66 h60
  text "Round" at 4788.86,1018.66 h60
  text "Top Layer - Bottom Layer" at 5164.02,1018.66 h60
  text "4" at 3561.16,894.34 h60
  text "33.46mil (0.850mm)" at 3893.16,894.34 h60
  text "PTH" at 4529.72,894.34 h60
  text "Round" at 4788.86,894.34 h60
  text "Top Layer - Bottom Layer" at 5164.02,894.34 h60
  text "6" at 3561.16,770.02 h60
  text "35.43mil (0.900mm)" at 3893.16,770.02 h60
  text "PTH" at 4529.72,770.02 h60
  text "Round" at 4788.86,770.02 h60
  text "Top Layer - Bottom Layer" at 5164.02,770.02 h60
  text "1" at 3561.16,645.7 h60
  text "40.00mil (1.016mm)" at 3893.16,645.7 h60
  text "PTH" at 4529.72,645.7 h60
  text "Round" at 4788.86,645.7 h60
  text "Top Layer - Bottom Layer" at 5164.02,645.7 h60
  text "9" at 3561.16,521.38 h60
  text "59.06mil (1.500mm)" at 3893.16,521.38 h60
  text "PTH" at 4529.72,521.38 h60
  text "Round" at 4788.86,521.38 h60
  text "Top Layer - Bottom Layer" at 5164.02,521.38 h60
  text "4" at 3561.16,397.06 h60
  text "63.00mil (1.600mm)" at 3893.16,397.06 h60
  text "PTH" at 4529.72,397.06 h60
  text "Round" at 4788.86,397.06 h60
  text "Top Layer - Bottom Layer" at 5164.02,397.06 h60
  text "50 Total" at 3561.16,272.74 h60
  text ".Layer_Name" at 577,-858.49 h60
M17 Embedded Cavity:
  text ".Layer_Name" at 577,-858.49 h60
M18 Embedded Assembly:
  text ".Layer_Name" at 577,-858.49 h60
M19 Embedded Keepout:
  text ".Layer_Name" at 577,-858.49 h60

## Dimensions
0,-400 to 1000,-400 on M2 Board Dimensions
0,0 to 0,1240 on M2 Board Dimensions
0,0 to 3090,0 on M2 Board Dimensions

## Text inside footprints (layer, text, board x,y; h text height)
C1: Top Overlay "+" at 1266.38,817.09 h47.24 r270; M5 Assembly Top "+" at 1266.38,817.09 h47.24 r270
C3: Top Overlay "+" at 3009.68,639.53 h59.06 r180; M5 Assembly Top "+" at 3009.68,639.53 h59.06 r180